# EAGLE board Desain Hardware Fahmi Mashuri (EAGLE 9.6.2)

No outline drawn. Coordinates in mm, seen from the top.
Copper layers (1*16): Top 0.035mm / dielectric 1.5mm / Bottom 0.035mm
Design rules "default": minimum track width 6mil, minimum drill 0.35mm, track to track 6mil, track to pad 6mil, pad to pad 6mil, via to via 6mil, smd to smd 6mil, copper to edge 40mil, drill to drill 6mil, minimum pad ring 10mil, minimum via ring 8mil, stop-mask expansion 4mil, vias tented up to drill 0mil, thermal gap 10mil

## Footprints (pad centres in the part's own frame; a part is rotated, then mirrored left to right if it is on the bottom)
C0805K = smd 1.3 x 1.6: 1 -1,0; 2 1,0
0603 = smd 1.1 x 1: 1 -0.85,0; 2 0.85,0
EIA3528 = smd 1.2 x 2.5: A 1.65,0; C -1.65,0
C0603K = smd 1.05 x 1.08: 1 -0.875,0; 2 0.875,0
SOD-323 = smd 0.9 x 0.9: A 1.15,0; C -1.15,0
1X14 = drill 1.016 pad 1.88: 1 0,0; 2 2.54,0; 3 5.08,0; 4 7.62,0; 5 10.16,0; 6 12.7,0; 7 15.24,0; 8 17.78,0; 9 20.32,0; 10 22.86,0; 11 25.4,0; 12 27.94,0; 13 30.48,0; 14 33.02,0
CUI_CMT-8530S-SMT = smd 2.5 x 2.5: 1 -3.5,3.5; 2 -3.5,-3.5; N 3.5,3.5; P 3.5,-3.5
SOT23-3 = smd 0.8 x 0.9: 1 -0.95,-1; 2 0.95,-1; 3 0,1.1
SOIC127P600X175-8N = smd 1.97 x 0.57: 1 -2.475,1.905; 2 -2.475,0.635; 3 -2.475,-0.635; 4 -2.475,-1.905; 5 2.475,-1.905; 6 2.475,-0.635; 7 2.475,0.635; 8 2.475,1.905
0603-RES = smd 1.1 x 1: 1 -0.85,0; 2 0.85,0
ESP-WROOM-32 = smd 0.9 x 1.5: 1 7.7,9; 2 6.43,9; 3 5.16,9; 4 3.89,9; 5 2.62,9; 6 1.35,9; 7 0.08,9; 8 -1.19,9; 9 -2.46,9; 10 -3.73,9; 11 -5,9; 12 -6.27,9; 13 -7.54,9; 14 -8.81,9; 25 -8.81,-9; 26 -7.54,-9; 27 -6.27,-9; 28 -5,-9; 29 -3.73,-9; 30 -2.46,-9; 31 -1.19,-9; 32 0.08,-9; 33 1.35,-9; 34 2.62,-9; 35 3.89,-9; 36 5.16,-9; 37 6.43,-9; 38 7.7,-9 | smd 1.5 x 0.9: 15 -10.3,5.715; 16 -10.3,4.445; 17 -10.3,3.175; 18 -10.3,1.905; 19 -10.3,0.635; 20 -10.3,-0.635; 21 -10.3,-1.905; 22 -10.3,-3.175; 23 -10.3,-4.445; 24 -10.3,-5.715 | smd 6 x 6: GND 0,0
SOIC-8 = smd 0.61 x 2.057: 1 -2.07,-2.892; 2 -0.8,-2.892; 3 0.47,-2.892; 4 1.74,-2.892; 5 1.74,2.492; 6 0.47,2.492; 7 -0.8,2.492; 8 -2.07,2.492 | smd 2.286 x 2.286: EPAD -0.165,-0.2
PN532_NFC = drill 1: GND 16.51,6.35; SCL 24.13,6.35; SDA 21.59,6.35; VCC 19.05,6.35
SOT23-6L = smd 0.55 x 1.2: 1 -0.95,-1.3; 2 0,-1.3; 3 0.95,-1.3; 4 0.95,1.3; 5 0,1.3; 6 -0.95,1.3
TSSOP8 = smd 1.2 x 0.35: 1 -2.925,0.975; 2 -2.925,0.325; 3 -2.925,-0.325; 4 -2.925,-0.975; 5 2.925,-0.975; 6 2.925,-0.325; 7 2.925,0.325; 8 2.925,0.975
PUSHBUTTOMICRO = smd 1.6 x 1.5: 1 -0.381,1.524; 2 4.445,1.524
SOT223 = smd 1.219 x 2.235: 1 -2.311,-3.099; 2 0,-3.099; 3 2.311,-3.099 | smd 3.6 x 2.2: 4 0,3.099
MICROSD-PUSH-OUT = smd 0.5 x 0.75: 1 9.625,0.225; 2 8.525,0.225; 3 7.425,0.225; 4 6.325,0.225; 5 5.225,0.225; 6 4.125,0.225; 7 3.025,0.225; 8 1.925,0.225; CD 0.825,0.225 | smd 1.2 x 1.8: G1 -0.375,-0.8 | smd 1.2 x 2.2: G2 -0.375,-10.1; G4 15.125,-10.1 | smd 1.6 x 1.5: G3 13.95,-0.55
ZX62D-B-5PA8 = smd 1.35 x 0.4: 1 4.825,1.3; 2 4.825,0.65; 3 4.825,0; 4 4.825,-0.65; 5 4.825,-1.3 | drill 1.5: S1 2.15,-3.6; S2 2.15,3.6 | drill 0.7 long: S3 5.05,2.425; S4 5.05,-2.425
SM02B-SRSS-TB = smd 0.6 x 1.55: 1 0.5,0; 2 -0.5,0 | smd 1.2 x 1.8: M1 1.8,3.875; M2 -1.8,3.875

## Placement (x,y rotation side)
C1  10uF  [C0805K]  3.29,-2.33 0 top
C2  1.0uF  [0603]  15.23,3.01 0 top
C3  0.1uF  [0603]  4.57,4.28 180 top
C4  2.2uF  [EIA3528]  43.05,44.66 270 top
C5  100nf  [C0603K]  47.24,49.11 270 top
C6  1uf  [C0805K]  46.35,44.79 90 top
C7  100nf  [C0603K]  44.95,49.11 270 top
C8  100nf  [C0603K]  42.54,49.11 270 top
C9  100nf  [C0603K]  40.51,-1.94 270 top
C10  1uF  [C0603K]  35.17,-2.96 0 top
C11  10uF  [C0603K]  40.25,2.37 270 top
D1  [SOD-323]  34.28,1.74 90 top
FRAME1  FRAME-LETTER  [CREATIVE_COMMONS]  0.12,-13.12 0 top
J1  [1X14]  57.4,6.95 90 top
LS1  CMT-8530S-SMT  [CUI_CMT-8530S-SMT]  7.74,45.3 270 bottom
Q1  2TY  [SOT23-3]  7.74,44.03 180 top
Q2  2TY  [SOT23-3]  50.92,24.98 270 top
Q3  IRF7319  [SOIC127P600X175-8N]  45.84,-0.04 0 top
R0  1k  [0603]  49.65,28.03 180 top
R1  10k  [0603]  -2.42,5.93 180 top
R2  10k  [0603]  1.39,44.41 90 top
R3  1.2k  [0603]  3.68,0.6 270 top
R4  100  [0603]  20.19,21.17 180 top
R5  100  [0603-RES]  3.93,6.44 180 top
R6  1k  [0603]  11.68,9.87 180 top
R7  100  [0603]  20.19,23.2 180 top
R8  100  [0603]  7.61,47.08 0 top
R9  10K  [0603]  48.13,24.98 90 top
R10  1.2k  [0603]  43.05,5.8 0 top
R11  100  [0603]  15.36,0.47 0 top
R12  100  [0603]  15.36,-1.31 0 top
R13  330  [0603]  46.86,5.8 180 top
R14  100k  [0603]  38.22,-1.94 270 top
R15  10K  [0603]  35.17,-1.05 180 top
R16  100k  [0603]  39.24,5.8 180 top
R17  300k  [0603]  38.35,2.5 90 top
R18  1k  [0603]  36.06,2.5 90 top
U1  ESP-WROOM-32  [ESP-WROOM-32]  4.82,25.23 270 bottom
U$1  DIO5158  [SOIC-8]  9.64,-0.04 270 top
U$2  PN532_NFC  [PN532_NFC]  15.11,51.52 180 bottom
U$3  DW01-P  [SOT23-6L]  8.38,6.44 90 top
U$4  FS8205A  [TSSOP8]  14.85,6.44 0 top
U$5  PUSHBUTTOMICRO  [PUSHBUTTOMICRO]  -2.55,3.9 90 bottom
U$6  PUSHBUTTOMICRO  [PUSHBUTTOMICRO]  0.12,46.57 270 bottom
U$7  AMS1117  [SOT223]  50.92,38.95 180 top
U$8  PUSHBUTTOMICRO  [PUSHBUTTOMICRO]  29.84,2.75 90 bottom
U$9  MICROSD-PUSH-OUT  [MICROSD-PUSH-OUT]  29.46,35.9 180 top
X1  ZX62D-B-5PA8  [ZX62D-B-5PA8]  22.98,-4.87 90 bottom
X3  SM02B-SRSS-TB  [SM02B-SRSS-TB]  -0.64,-0.29 270 bottom

## Library data of the parts
C1 C5-C11 = rcl; SPICEPREFIX: C
C2 = SparkFun-Capacitors; PROD_ID: CAP-00868
C3 = SparkFun-Capacitors; PROD_ID: CAP-08604
C4 = SparkFun-Capacitors; PROD_ID: CAP-10790
D1 = bt_diode
FRAME1 = SparkFun-Aesthetics
J1 = SparkFun-Connectors
LS1 = Buzzer_SMD; AVAILABILITY: Good; CUI_PURCHASE_URL: https://www.cuidevices.com/product/audio/buzzers/audio-transducers/cmt-8530s-smt-tr?utm_source=snapeda.com&utm_medium=referral&utm_campaign=snapedaBOM; DESCRIPTION: 8.5 mm, 3.6 Vo-p, 90 dB, Surface Mount (SMT), Magnetic Audio Transducer Buzzer; MF: CUI Devices; MP: CMT-8530S-SMT-TR; PACKAGE: CUI; PRICE: None; PURCHASE-URL: https://pricing.snapeda.com/search/part/CMT-8530S-SMT-TR/?ref=eda
Q1 Q2 = SparkFun-DiscreteSemi; PROD_ID: TRANS-08052
Q3 = IRF7319; AVAILABILITY: Unavailable; DESCRIPTION: Mosfet Array N and P-Channel 30V 2W Surface Mount 8-SO; MF: Infineon Technologies; MP: IRF7319; PACKAGE: SOIC-8 International Rectifier; PRICE: None
R0 R1 R2 R4 R7-R9 R11 R12 R14-R18 = SparkFun-Resistors; PROD_ID: RES-10055
R3 R10 R13 = SparkFun-Resistors; PROD_ID: RES-09568
R5 U$4 = SparkFun
R6 = SparkFun-Resistors; PROD_ID: RES-07856
U1 = SparkFun-RF; PROD_ID: IC-13849
U$1 = ERADIONICA
U$2 = PN532
U$3 = lipo
U$5 U$6 U$8 = PUSHBUTTOMICRO
U$7 = SparkFun-IC-Power; PROD_ID: VREG-13917
U$9 = microsd
X1 = zx62d-b-5pa8-oshpark_10; MF: Hirose; MPN: ZX62D-B-5PA8; OC_FARNELL: 2300438; OC_NEWARK: 69W0712
X3 = con-JST SH

## Nets
3.3V: C5.1 C7.1 C8.1 J1.1 Q1.2 Q2.2 R1.2 R2.2 R9.1 U1.2 U$2.VCC U$7.2 U$9.4
BAT: C1.1 C9.1 Q3.3 R5.2 R14.1 R15.1 U$1.5 X3.2
EN: R1.1 U1.3 U$5.2
GND: C1.2 C2.2 C4.C C5.2 C6.2 C7.2 C8.2 J1.2 LS1.N Q3.1 R3.1 R6.1 R10.1 U1.1 U1.15 U1.38 U1.GND U$1.1 U$1.3 U$2.GND U$4.6 U$4.7 U$5.1 U$6.1 U$7.1 U$8.2 U$9.6 U$9.G1 U$9.G2 U$9.G3 U$9.G4 X1.5
GND-ISO: C3.1 U$3.6 U$4.2 U$4.3 X3.1
IO0: R2.1 U1.25 U$6.2
IO_2: J1.5 U1.24
IO_4: J1.4 U1.26
IO_5: U1.29 U$9.2
IO_15: J1.3 U1.23
IO_16: U1.16 U$9.CD
IO_17: R18.1 U1.28
IO_18: J1.7 J1.10 U1.30 U$9.5
IO_19: J1.13 U1.31 U$9.7
IO_21: U1.33 U$2.SDA
IO_22: U1.36 U$2.SCL
IO_23: J1.6 J1.12 U1.37 U$9.3
IO_26: R12.2 U1.11
IO_27: J1.11 U1.12
IO_32: R0.2 U1.8
IO_33: R8.1 U1.9
IO_35: R11.2 U1.7
IO_36: R10.2 R13.2 U1.4
LED_D: J1.8 Q2.3
N$1: R6.2 U$3.2
N$2: U$3.3 U$4.5
N$3: R3.2 U$1.2
N$4: U$3.1 U$4.4
N$5: R4.1 X1.3
N$6: R7.1 X1.2
N$7: LS1.P Q1.3
N$8: Q1.1 R8.2
N$9: Q2.1 R0.1 R9.2
N$10: R11.1 U$1.7
N$11: R12.1 U$1.6
N$12: D1.A R16.2 R17.2 R18.2
N$13: C11.2 Q3.2 R17.1
N$14: C9.2 C10.2 Q3.4 Q3.7 Q3.8 R14.2
N$15: C10.1 D1.C R15.2 U$8.1
RXD: R4.2 U1.35
TXD: R7.2 U1.34
VCC: C2.1 U$1.4 U$1.8 X1.1
VCC-DW: C3.2 R5.1 U$3.5
VIN: C4.A C6.1 C11.1 Q3.5 Q3.6 R13.1 R16.1 U$7.3

## Tracks (layer width: path | path; a pad name or v marks a point on that pad's centre or on a via)
3.3V  (12 unrouted)
BAT  (7 unrouted)
EN  (2 unrouted)
GND  (31 unrouted)
GND-ISO  (4 unrouted)
IO0  (2 unrouted)
IO_2  (1 unrouted)
IO_4  (1 unrouted)
IO_5  (1 unrouted)
IO_15  (1 unrouted)
IO_16  (1 unrouted)
IO_17  (1 unrouted)
IO_18  (3 unrouted)
IO_19  (2 unrouted)
IO_21  (1 unrouted)
IO_22  (1 unrouted)
IO_23  (3 unrouted)
IO_26  (1 unrouted)
IO_27  (1 unrouted)
IO_32  (1 unrouted)
IO_33  (1 unrouted)
IO_35  (1 unrouted)
IO_36  (2 unrouted)
LED_D  (1 unrouted)
N$1  (1 unrouted)
N$2  (1 unrouted)
N$3  (1 unrouted)
N$4  (1 unrouted)
N$5  (1 unrouted)
N$6  (1 unrouted)
N$7  (1 unrouted)
N$8  (1 unrouted)
N$9  (2 unrouted)
N$10  (1 unrouted)
N$11  (1 unrouted)
N$12  (3 unrouted)
N$13  (2 unrouted)
N$14  (5 unrouted)
N$15  (3 unrouted)
RXD  (1 unrouted)
TXD  (1 unrouted)
VCC  (3 unrouted)
VCC-DW  (2 unrouted)
VIN  (7 unrouted)

## Text on the board
tPlace: By : Cahyo Rama
bPlace: BOOT_O | ESP32_DEVKIT | RESET | POWER SWITCH | BATERAI 1S | UPLOADER FTDI